# Altium PCB power.PcbDoc
Units mil, origin at the board's own origin, x right, y up, seen from the top; angles counter-clockwise.
Board outline 2165.35 x 3740.16 mil, 2 copper layers (Top Layer, Bottom Layer); 14 components, 6 nets, 30 pads, 48 vias.
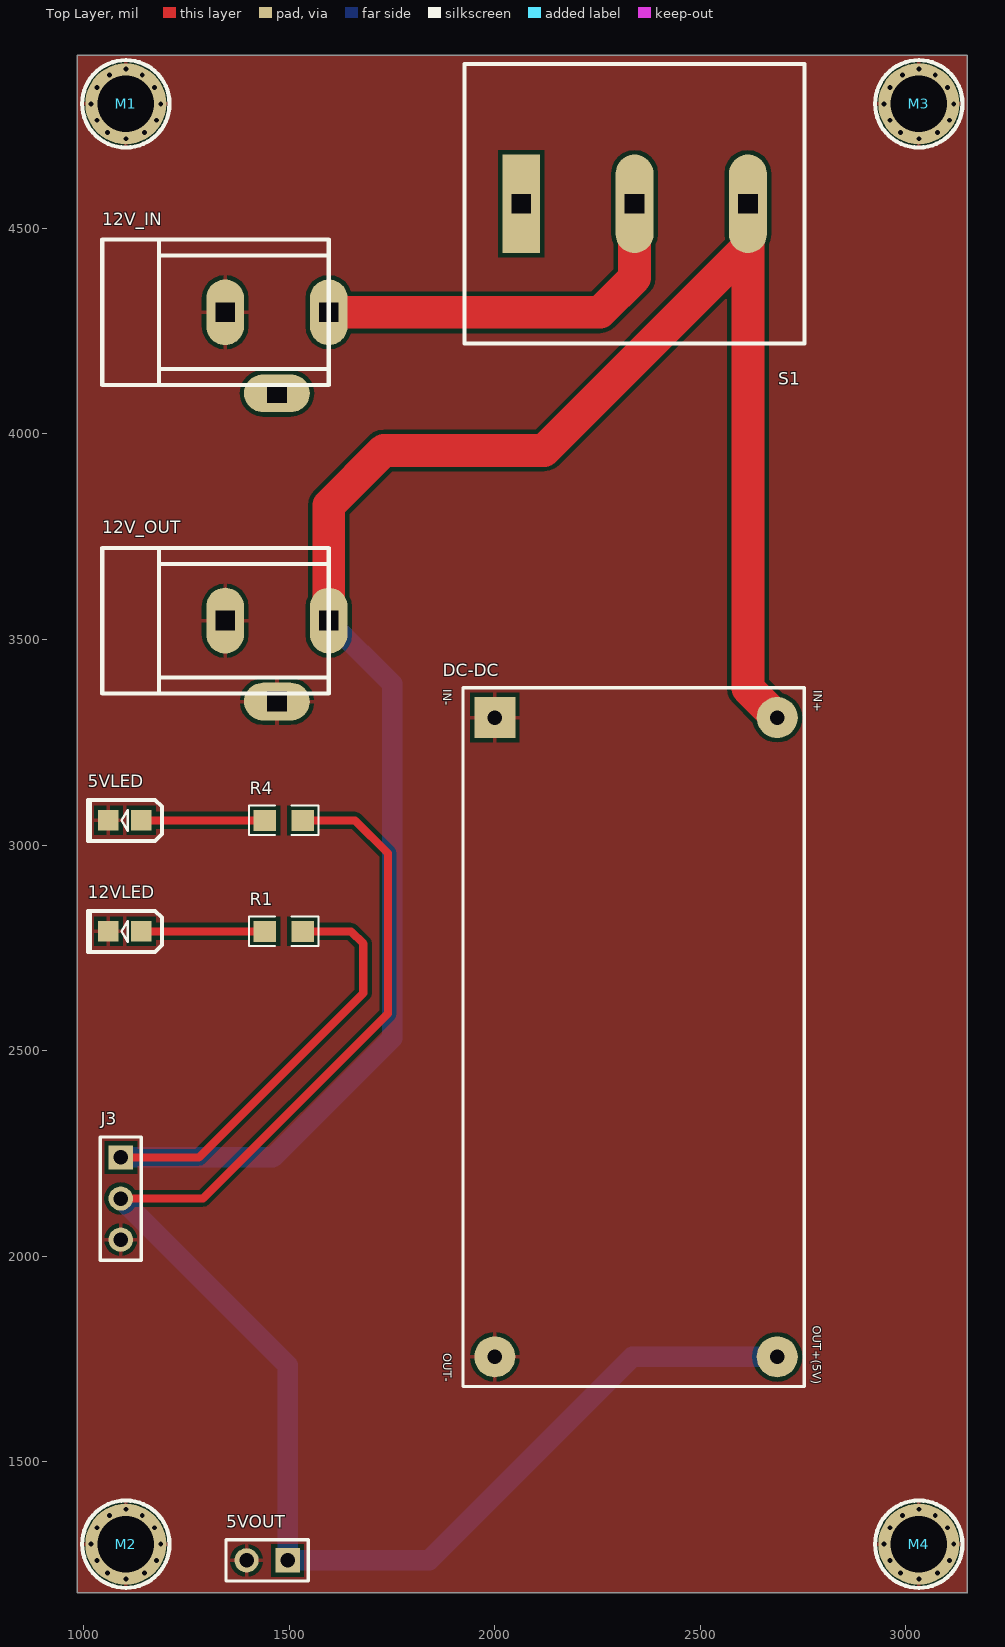
[diagram p0: Top Layer view]
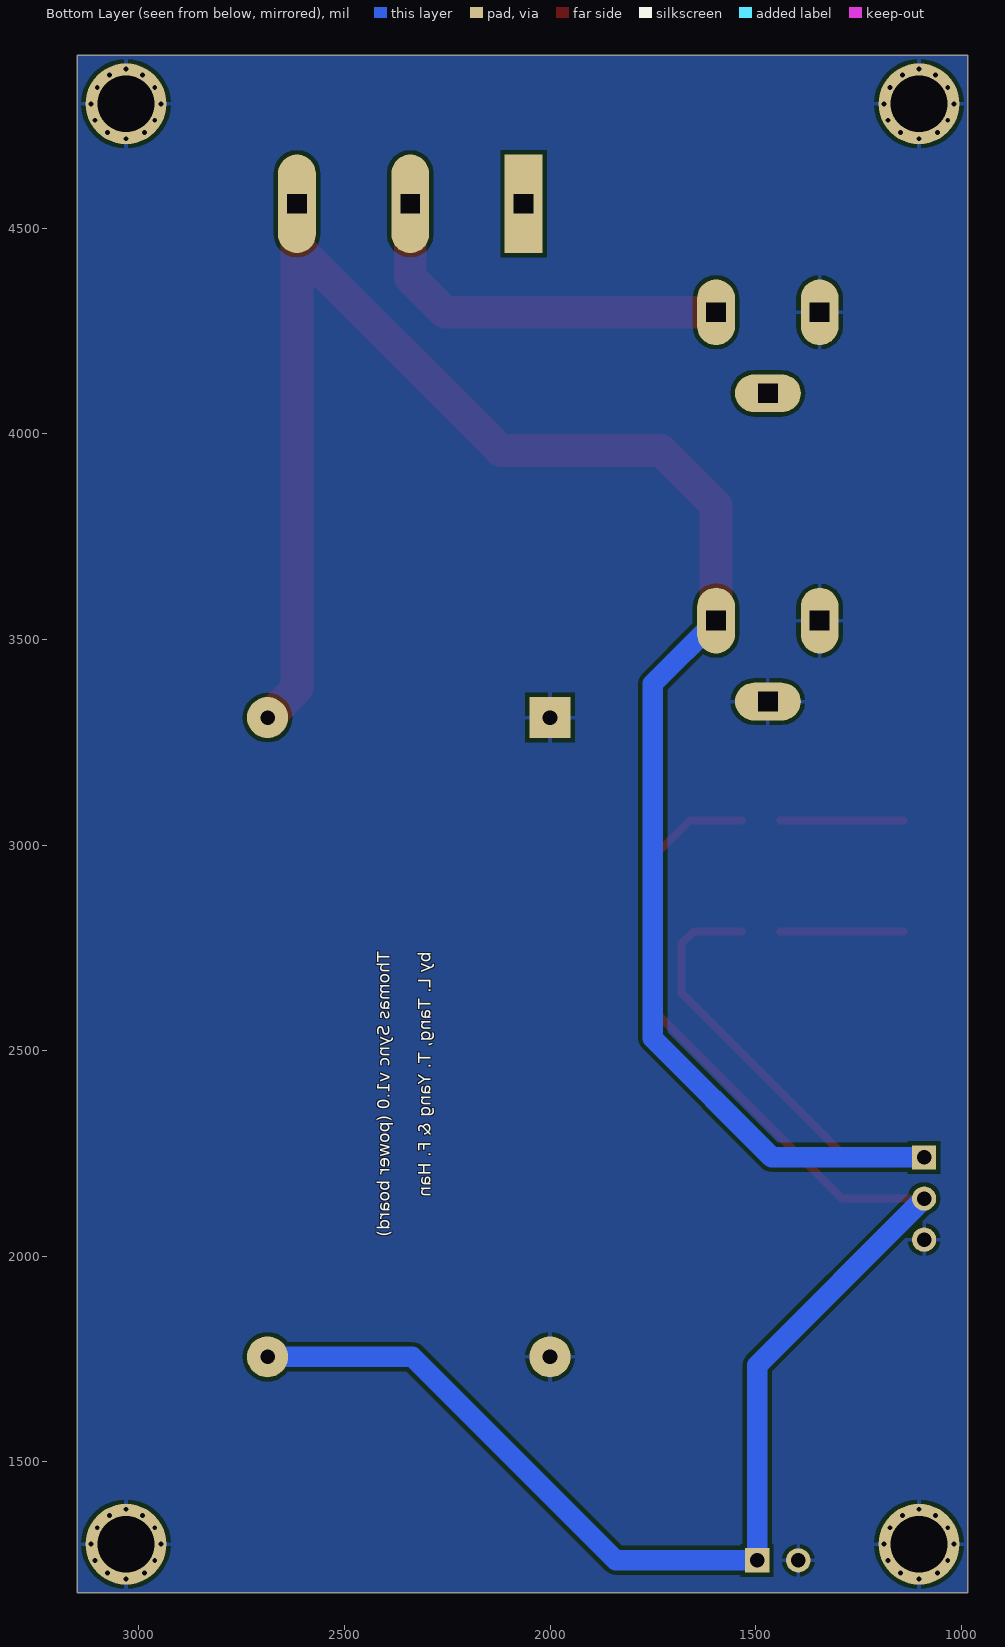
[diagram p1: Bottom Layer view, seen from below]

## Layer stack, top to bottom
Top Solder: solder mask 0.4, Solder Resist, Dk 3.5
Top Layer: signal copper 1.4
Dielectric 1: dielectric 12.6, FR-4, Dk 4.8
Bottom Layer: signal copper 1.4
Bottom Solder: solder mask 0.4, Solder Resist, Dk 3.5

## Board outline
984.25,4921.26 3149.61,4921.26 3149.61,1181.1 984.25,1181.1

## Design rules (kind name [scope] priority, off if disabled: settings)
Clearance [All] p1: gap=10
HoleSize [All] p1: absolutevalues=TRUE maxlimit=157.48 minlimit=0.98 maxpercent=80.000 minpercent=20.000
PolygonConnect [All] p1: connectstyle=Relief reliefconductorwidth=10 reliefentries=4 polygonreliefangle="90 Angle" airgapwidth=10
RoomDefinition power [InComponentClass('power')] p1: confinementstyle=ConfineIn formatcopy=TRUE lockcomponents=FALSE outline 984.25,1181.1 3150,1181.1 3150,4920 984.25,4920
RoutingVias [All] p1: holewidth=28 width=50 viastyle="Through Hole" minholewidth=28 minwidth=50 maxholewidth=28 maxwidth=50
SolderMaskExpansion [All] p1: expansion=4
Width [All] p1: maxlimit=80 minlimit=10 preferedwidth=10
29 further rules are at their usual default settings.

## Components (designator, comment, footprint, x,y, rotation, side; value= is the part's Value field where it differs from the comment)
5VLED "5V LED" 0805D 1140,3060 r180 top
5VOUT "Header 2" HDR1X2 1496.06,1259.84 r180 top
12V_IN "12V IN" PW_PORT 1450,4300 r90 top
12V_OUT "12V OUT" PW_PORT 1450,3550 r90 top
12VLED "12V LED" 0805D 1140,2790 r180 top
DC-DC "DC-DC" DC-DC5V_HDR2*2 2000,3310 r270 top
J3 "Header 3" HDR1X3 1090,2240 r270 top
M1 "Mount" 安装孔-3.5-5 1102.36,4803.15 r0 top
M2 "Mount" 安装孔-3.5-5 1102.36,1299.21 r0 top
M3 "Mount" 安装孔-3.5-5 3031.5,4803.15 r0 top
M4 "Mount" 安装孔-3.5-5 3031.5,1299.21 r0 top
R1 "510R" 0805R 1440,2790 r0 top
R4 "150R" 0805R 1440,3060 r0 top
S1 "Switch" PW_KCD2115 2340,4560 r90 top

## Footprints (in the part's own frame and the unit in brackets; to place one, negate y for a bottom-side part, rotate by r counter-clockwise, add the part's x,y. Pads: shape width x height; smd on the part's side, far side on the other; paste and mask are expansions set on the pad)
0805D [mil] "二?"
  rect 50x50 smd: 1(0,0) 2(80,0)
  silkscreen extent -50,-50 130,50
0805R [mm]
  rect 1.4x1.3 smd: 1(0,0) 2(2.362,0)
  silkscreen extent -0.97,-0.91 3.33,0.91
DC-DC5V_HDR2*2 [mm] "Connector; Header; 12x2 Position"
  rect 2.54x2.54 hole 0.9: 1(0,0)
  round 2.54 hole 0.9: 2(0,17.45) 3(39.497,0) 4(39.497,17.45)
  silkscreen extent -1.84,-1.97 41.34,19.11
HDR1X2 [mm] "Connector; Header; 2 Position"
  rect 1.5x1.5 hole 0.9: 1(0,0)
  round 1.5 hole 0.9: 2(2.54,0)
  silkscreen extent -1.27,-1.27 3.81,1.27
HDR1X3 [mm] "Connector; Header; 3 Position"
  rect 1.5x1.5 hole 0.9: 1(0,0)
  round 1.5 hole 0.9: 2(2.54,0) 3(5.08,0)
  silkscreen extent -1.27,-1.27 6.35,1.27
PW_KCD2115 [mil]
  oval 240x92 hole 47 square: 1(0,-275.59) 2(0,0)
  rect 240x92 hole 47 square: ""(0,275.59)
  silkscreen extent -340,-413 340,413
PW_PORT [mil]
  oval 160x92 hole 47 square: 1(-4,-146) 3(-4,106)
  oval 92x160 hole 47 square: 2(-201,-20)
  silkscreen extent -181,-146 173,405
安装孔-3.5-5 [mm]
  round 5 hole 3.5: 1(0,0)
  silkscreen extent -2.7,-2.7 2.7,2.7

## Part data
5VLED 12VLED: library part LED2, "RED"
5VOUT: "Header, 2-Pin"
12V_IN 12V_OUT: library part CON3
DC-DC: library part "Header 2X2", "Header, 2-Pin, Dual row"
J3: "Header, 3-Pin"
M1 M2 M3 M4: library part Plug, "Plug"
R1 R4: library part Res1, "Resistor"
S1: library part SW-SPST, "Single-Pole, Single-Throw Switch"

## Via types
v1: diameter 25, hole 12, Top Layer to Bottom Layer, 48 vias

## Nets (pads, with @x,y where several pads share a name; then routed paths per layer and width w, separated by ;. In a path a pad name is that pad's centre, name@x,y a point inside that pad or via, vN(x,y) a via of type N, cw(c..) or ccw(c..) an arc to the next point about the centre after c; other vN are vias at no path point)
GND: 5VLED.2 5VOUT.2 12V_IN.3 12V_OUT.2 12V_OUT.3 12VLED.2 DC-DC.1 DC-DC.3 J3.3 M1.1 M2.1 M3.1 M4.1
  other v1: 1102.36,1214.21 3031.5,1214.21 1057.36,1229.21 1147.36,1229.21 2986.5,1229.21 3076.5,1229.21 1032.36,1259.21 1177.36,1259.21 2961.5,1259.21 3106.5,1259.21 1017.36,1299.21 1187.36,1299.21 2946.5,1299.21 3116.5,1299.21 1032.36,1339.21 1172.36,1339.21 2961.5,1339.21 3101.5,1339.21 1062.36,1369.21 1142.36,1369.21 2991.5,1369.21 3071.5,1369.21 1102.36,1384.21 3031.5,1384.21 1102.36,4718.15 3031.5,4718.15 1057.36,4733.15 1147.36,4733.15 2986.5,4733.15 3076.5,4733.15 1032.36,4763.15 1177.36,4763.15 2961.5,4763.15 3106.5,4763.15 1017.36,4803.15 1187.36,4803.15 2946.5,4803.15 3116.5,4803.15 1032.36,4843.15 1172.36,4843.15 2961.5,4843.15 3101.5,4843.15 1062.36,4873.15 1142.36,4873.15 2991.5,4873.15 3071.5,4873.15 1102.36,4888.15 3031.5,4888.15
Net5VLED_1: 5VLED.1 R4.1 | length 300
  Top Layer w20: 5VLED.1 R4.1
Net12V_IN_1: 12V_IN.1 S1.2 | length 958.8
  Top Layer w80: 12V_IN.1 2256,4296 2340,4380 S1.2
Net12VLED_1: 12VLED.1 R1.1 | length 300
  Top Layer w20: 12VLED.1 R1.1
VDD_5V: 5VOUT.1 DC-DC.4 J3.2 R4.2 | length 3910.9
  Top Layer w20: J3.2 1290,2140 1740,2590 1740,2980 1660,3060 R4.2
  Bottom Layer w50: J3.2 1496.06,1733.94 5VOUT.1 1839.84,1259.84 2335,1755 DC-DC.4
VDD_12V_IN: 12V_OUT.1 DC-DC.2 J3.1 R1.2 S1.1 | length 5839.4
  Top Layer w20: J3.1 1280,2240 1680,2640 1680,2760 1650,2790 R1.2
  Top Layer w80: 12V_OUT.1 1596,3826 1730,3960 2120,3960 2615.59,4455.59 S1.1 2615.59,3381.42 DC-DC.2
  Bottom Layer w50: J3.1 1460,2240 1750,2530 1750,3392 12V_OUT.1
pads on no net: 12V_IN.2 S1.

## Polygon pours and split planes (outlines as drawn)
GND on Bottom Layer "Top Layer-No Net" (solid, pour order 4): 984.25,4921.26 3149.61,4921.26 3149.61,1181.1 984.25,1181.1
GND on Top Layer "Top Layer-No Net" (solid, pour order 6): 984.25,4920 3148.35,4920 3149.61,4921.26 3150,4920.87 3150,1181.1 984.25,1181.1

## Silkscreen, mask and mechanical layers (free items; w line width, h text height)
Bottom Overlay:
  text "by L. Tang, T. Yang & F. Han" at 2290,2740 h30 r270
  text "Thomas Sync v1.0 (power board)" at 2390,2740 h30 r270
Mechanical 1:
  lines w10: 984.25,1181.1 984.25,4921.26 3149.61,4921.26 ; 984.25,1181.1 984.25,1181.1 ; 984.25,1181.1 3149.61,1181.1 3149.61,4921.26 ; 3149.61,4921.26 3149.61,4921.26

## Text inside footprints (layer, text, board x,y; h text height)
DC-DC: Top Overlay "IN+" at 2776,3376 h20 r270; Top Overlay "IN-" at 1874,3379 h20 r270; Top Overlay "OUT-" at 1875,1764 h20 r270; Top Overlay "OUT+(5V)" at 2774,1831 h20 r270